# EAGLE board line follower (EAGLE 7.2.0)
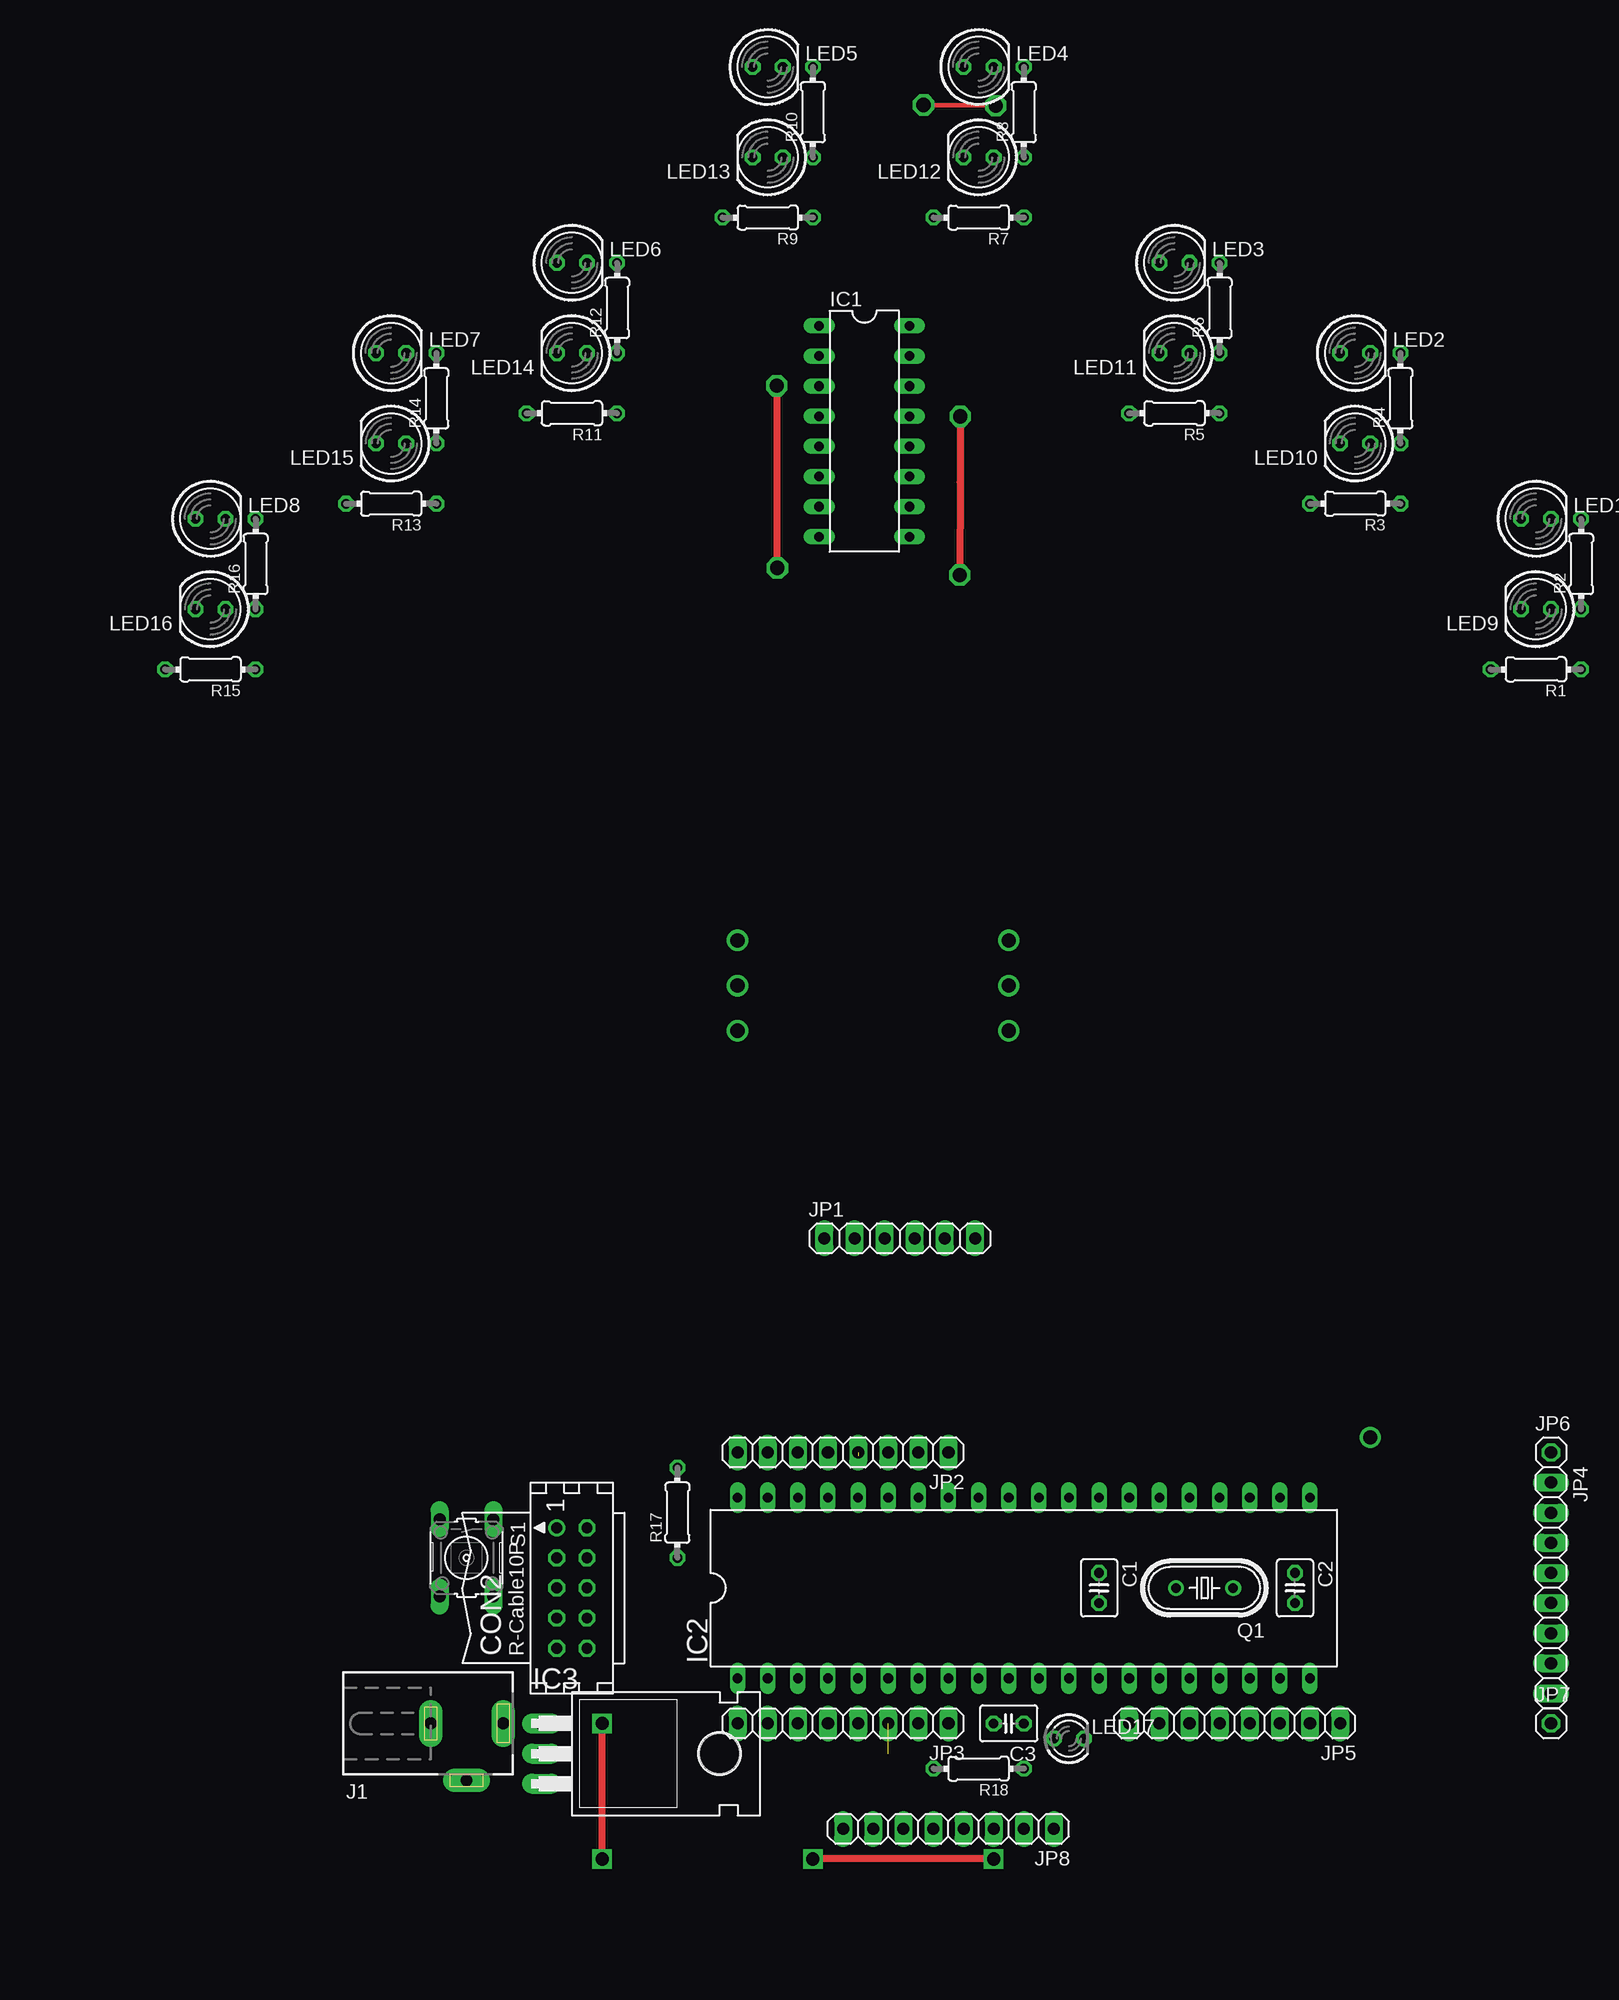
[diagram p0: board, top side]
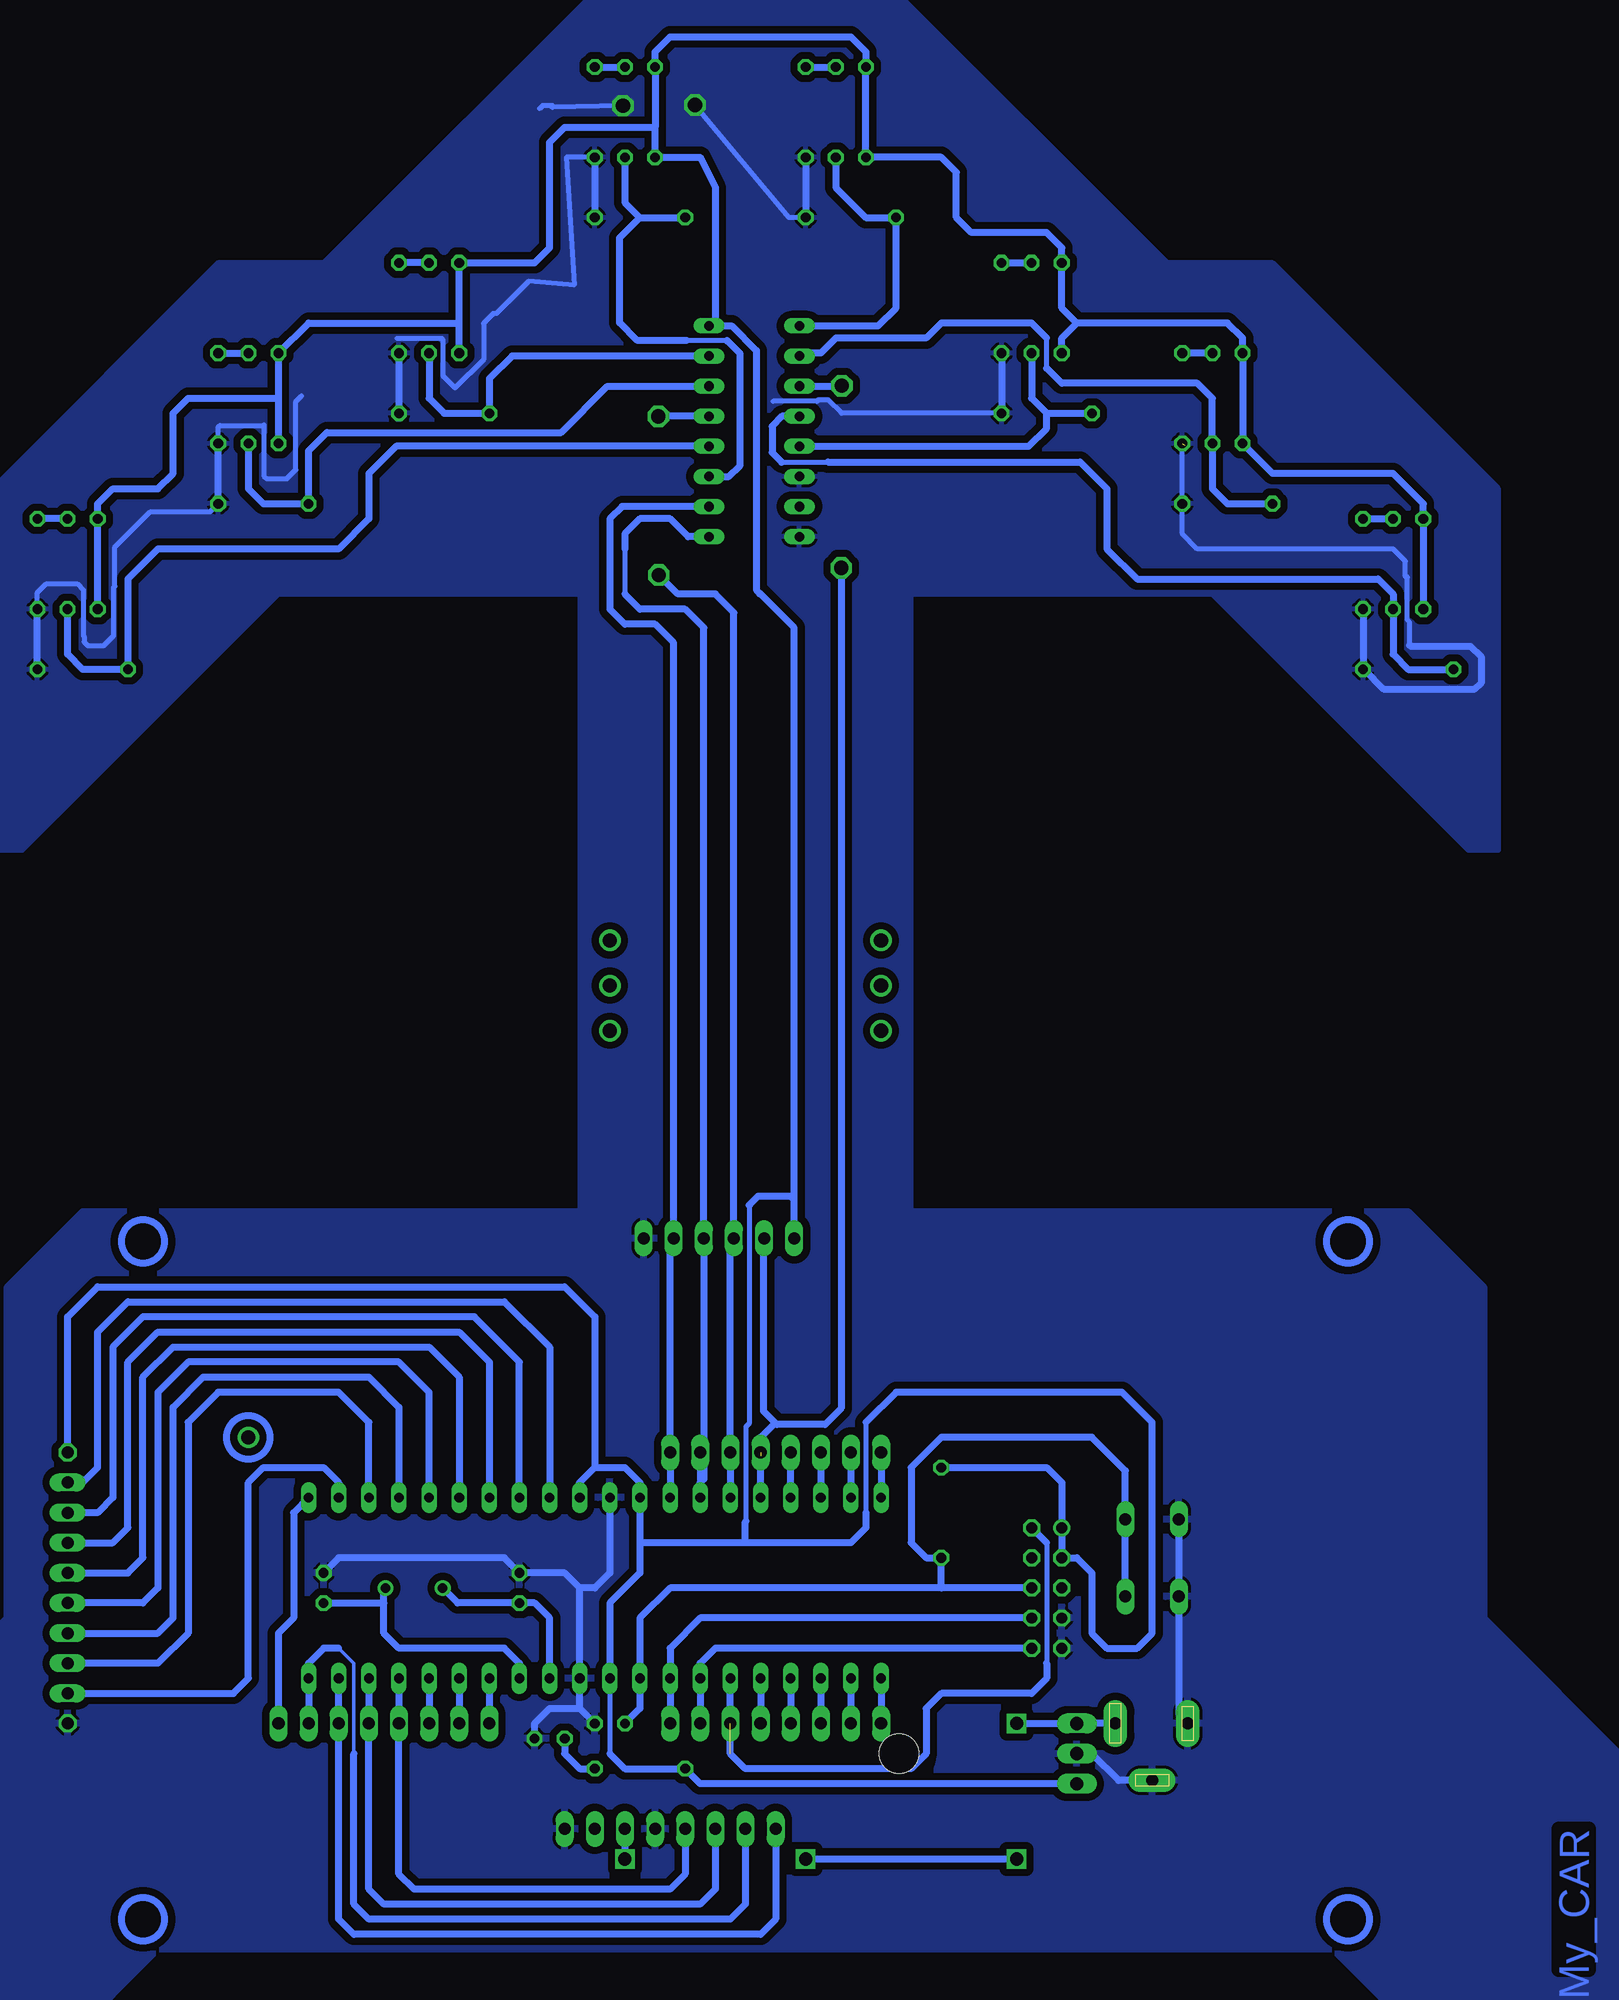
[diagram p1: board, bottom side, seen from below]

No outline drawn. Coordinates in mm, seen from the top.
Copper layers (1*16): Top 0.035mm / dielectric 1.5mm / Bottom 0.035mm
Design rules "default": minimum track width 10mil, minimum drill 24mil, track to track 8mil, track to pad 8mil, pad to pad 8mil, via to via 8mil, smd to smd 8mil, copper to edge 40mil, drill to drill 8mil, minimum pad ring 10mil, minimum via ring 8mil, stop-mask expansion 4mil, vias tented up to drill 0mil, thermal gap 10mil

## Footprints (pad centres in the part's own frame; a part is rotated, then mirrored left to right if it is on the bottom)
C025-030X050 = drill 0.813 octagon: 1 -1.27,0; 2 1.27,0
CON10L = drill 0.914: 1 5.08,1.27 | drill 0.914 octagon: 2 5.08,-1.27; 3 2.54,1.27; 4 2.54,-1.27; 5 0,1.27; 6 0,-1.27; 7 -2.54,1.27; 8 -2.54,-1.27; 9 -5.08,1.27; 10 -5.08,-1.27
DIL16 = drill 0.813 long: 1 -8.89,-3.81; 2 -6.35,-3.81; 3 -3.81,-3.81; 4 -1.27,-3.81; 5 1.27,-3.81; 6 3.81,-3.81; 7 6.35,-3.81; 8 8.89,-3.81; 9 8.89,3.81; 10 6.35,3.81; 11 3.81,3.81; 12 1.27,3.81; 13 -1.27,3.81; 14 -3.81,3.81; 15 -6.35,3.81; 16 -8.89,3.81
DIL40 = drill 0.813 long: 1 -24.13,-7.62; 2 -21.59,-7.62; 3 -19.05,-7.62; 4 -16.51,-7.62; 5 -13.97,-7.62; 6 -11.43,-7.62; 7 -8.89,-7.62; 8 -6.35,-7.62; 9 -3.81,-7.62; 10 -1.27,-7.62; 11 1.27,-7.62; 12 3.81,-7.62; 13 6.35,-7.62; 14 8.89,-7.62; 15 11.43,-7.62; 16 13.97,-7.62; 17 16.51,-7.62; 18 19.05,-7.62; 19 21.59,-7.62; 20 24.13,-7.62; 21 24.13,7.62; 22 21.59,7.62; 23 19.05,7.62; 24 16.51,7.62; 25 13.97,7.62; 26 11.43,7.62; 27 8.89,7.62; 28 6.35,7.62; 29 3.81,7.62; 30 1.27,7.62; 31 -1.27,7.62; 32 -3.81,7.62; 33 -6.35,7.62; 34 -8.89,7.62; 35 -11.43,7.62; 36 -13.97,7.62; 37 -16.51,7.62; 38 -19.05,7.62; 39 -21.59,7.62; 40 -24.13,7.62
TO220H = drill 1.118 long: 1 -2.54,-10.16; 2 0,-10.16; 3 2.54,-10.16 | hole 3.302: 0,4.826
DCJ0303 = drill 1 pad 2 long: 1 0,3.1; 2 4.8,0; 3 0,-3
1X06 = drill 1.016 long: 1 -6.35,0; 2 -3.81,0; 3 -1.27,0; 4 1.27,0; 5 3.81,0; 6 6.35,0
1X08 = drill 1.016 long: 1 -8.89,0; 2 -6.35,0; 3 -3.81,0; 4 -1.27,0; 5 1.27,0; 6 3.81,0; 7 6.35,0; 8 8.89,0
1X01 = drill 1.016 octagon: 1 0,0
LED5MM = drill 0.813 octagon: A -1.27,0; K 1.27,0
LED3MM = drill 0.813 octagon: A -1.27,0; K 1.27,0
HC49U-V = drill 0.813: 1 -2.413,0; 2 2.413,0
0204/7 = drill 0.813 octagon: 1 -3.81,0; 2 3.81,0
B3F-10XX = drill 1.016 long: 1 -3.251,2.261; 2 3.251,2.261; 3 -3.251,-2.261; 4 3.251,-2.261

## Placement (x,y rotation side)
C1  [C025-030X050]  -66.04,-50.8 270 top
C2  [C025-030X050]  -49.53,-50.8 270 top
C3  [C025-030X050]  -73.66,-62.23 180 top
CON2  [CON10L]  -110.49,-50.8 90 top
IC1  4052N  [DIL16]  -85.83,46.75 270 top
IC2  MEGA32-P  [DIL40]  -72.39,-50.8 0 top
IC3  7805T  [TO220H]  -102.87,-64.77 270 top
J1  [DCJ0303]  -119.38,-62.23 270 top
JP1  [1X06]  -82.85,-21.31 0 top
JP2  [1X08]  -87.63,-39.37 180 top
JP3  [1X08]  -87.63,-62.23 180 top
JP4  [1X08]  -27.94,-50.8 270 top
JP5  [1X08]  -54.61,-62.23 180 top
JP6  [1X01]  -27.94,-39.37 0 top
JP7  [1X01]  -27.94,-62.23 0 top
JP8  [1X08]  -78.74,-71.12 180 top
LED1  [LED5MM]  -29.21,39.37 0 top
LED2  [LED5MM]  -44.45,53.34 0 top
LED3  [LED5MM]  -59.69,60.96 0 top
LED4  [LED5MM]  -76.2,77.47 0 top
LED5  [LED5MM]  -93.98,77.47 0 top
LED6  [LED5MM]  -110.49,60.96 0 top
LED7  [LED5MM]  -125.73,53.34 0 top
LED8  [LED5MM]  -140.97,39.37 0 top
LED9  [LED5MM]  -29.21,31.75 180 top
LED10  [LED5MM]  -44.45,45.72 180 top
LED11  [LED5MM]  -59.69,53.34 180 top
LED12  [LED5MM]  -76.2,69.85 180 top
LED13  [LED5MM]  -93.98,69.85 180 top
LED14  [LED5MM]  -110.49,53.34 180 top
LED15  [LED5MM]  -125.73,45.72 180 top
LED16  [LED5MM]  -140.97,31.75 180 top
LED17  [LED3MM]  -68.58,-63.5 0 top
Q1  [HC49U-V]  -57.15,-50.8 180 top
R1  [0204/7]  -29.21,26.67 180 top
R2  [0204/7]  -25.4,35.56 90 top
R3  [0204/7]  -44.45,40.64 180 top
R4  [0204/7]  -40.64,49.53 90 top
R5  [0204/7]  -59.69,48.26 180 top
R6  [0204/7]  -55.88,57.15 90 top
R7  [0204/7]  -76.2,64.77 180 top
R8  [0204/7]  -72.39,73.66 90 top
R9  [0204/7]  -93.98,64.77 180 top
R10  [0204/7]  -90.17,73.66 90 top
R11  [0204/7]  -110.49,48.26 180 top
R12  [0204/7]  -106.68,57.15 90 top
R13  [0204/7]  -125.73,40.64 180 top
R14  [0204/7]  -121.92,49.53 90 top
R15  [0204/7]  -140.97,26.67 180 top
R16  [0204/7]  -137.16,35.56 90 top
R17  [0204/7]  -101.6,-44.45 90 top
R18  [0204/7]  -76.2,-66.04 180 top
S1  [B3F-10XX]  -119.38,-48.26 270 top

## Library data of the parts
C1-C3 R17 R18 = rcl
CON2 = con-harting; OC_FARNELL: unknown; OC_NEWARK: unknown
IC1 = 40xx
IC2 = atmel; MPN: ATMEGA32-16PU; OC_FARNELL: 1661729; OC_NEWARK: 51P1794
IC3 = linear
J1 = con-jack; OC_FARNELL: unknown; OC_NEWARK: unknown
JP1-JP8 = pinhead
LED1-LED17 = led
Q1 = crystal; OC_FARNELL: 1666969; OC_NEWARK: unknown
R1-R16 = resistor
S1 = switch-omron; MPN: B3F-1000; OC_FARNELL: 176432; OC_NEWARK: 36M3542

## Nets
+12V: IC3.1 J1.1 JP8.3
GND: C1.1 C2.1 C3.1 CON2.7 CON2.9 IC1.6 IC1.8 IC2.11 IC2.31 IC3.2 J1.2 J1.3 JP1.6 JP7.1 JP8.1 JP8.4 LED17.K R1.1 R2.1 R3.1 R4.1 R5.1 R6.1 R7.1 R8.1 R9.1 R10.1 R11.1 R12.1 R13.1 R14.1 R15.1 R16.1 S1.3 S1.4
N$1: LED1.K R2.2
N$2: IC1.12 LED9.A R1.2
N$3: IC1.9 IC2.34 JP1.4 JP2.2
N$4: IC2.37 JP2.5
N$5: LED2.K R4.2
N$6: IC1.14 LED10.A R3.2
N$7: LED3.K R6.2
N$8: IC1.15 LED11.A R5.2
N$9: LED4.K R8.2
N$10: IC1.11 LED12.A R7.2
N$11: LED5.K R10.2
N$12: IC1.3 IC2.36 JP1.2 JP2.4
N$13: LED6.K R12.2
N$14: IC1.13 IC2.35 JP1.3 JP2.3
N$15: LED7.K R14.2
N$17: LED8.K R16.2
N$18: IC2.19 JP5.3 JP8.8
N$24: C1.2 IC2.12 Q1.2
N$25: C2.2 IC2.13 Q1.1
N$26: CON2.8 IC2.8 JP3.1
N$27: C3.2 CON2.6 IC2.9 R17.1 S1.1 S1.2
N$28: LED17.A R18.1
N$29: CON2.2 IC2.6 JP3.3
N$30: CON2.10 IC2.7 JP3.2
N$31: IC1.10 IC2.33 JP1.5 JP2.1
N$32: IC2.38 JP2.6
N$33: IC2.39 JP2.7
N$34: IC2.40 JP2.8
N$38: IC2.5 JP3.4
N$39: IC2.4 JP3.5
N$40: IC2.3 JP3.6
N$41: IC2.2 JP3.7
N$42: IC2.1 JP3.8
N$43: IC2.29 JP4.1
N$44: IC1.4 LED16.A R15.2
N$45: IC1.2 LED15.A R13.2
N$46: IC1.5 LED14.A R11.2
N$47: IC1.1 LED13.A R9.2
N$48: IC2.28 JP4.2
N$49: IC2.27 JP4.3
N$50: IC2.26 JP4.4
N$51: IC2.25 JP4.5
N$52: IC2.24 JP4.6
N$53: IC2.23 JP4.7
N$54: IC2.22 JP4.8
N$55: IC2.21 JP5.1
N$56: IC2.20 JP5.2 JP8.7
N$58: IC2.18 JP5.4 JP8.6
N$59: IC2.17 JP5.5 JP8.5
N$60: IC2.16 JP5.6
N$61: IC2.15 JP5.7
N$62: IC2.14 JP5.8
VCC: CON2.1 CON2.3 IC1.16 IC2.10 IC2.30 IC2.32 IC3.3 JP1.1 JP6.1 LED1.A LED2.A LED3.A LED4.A LED5.A LED6.A LED7.A LED8.A LED9.K LED10.K LED11.K LED12.K LED13.K LED14.K LED15.K LED16.K R17.2 R18.2
VEE: IC1.7

## Tracks (layer width: path | path; a pad name or v marks a point on that pad's centre or on a via)
+12V  (via drill 1.1)
  Top 0.61: v-74.93,-73.66 v-90.17,-73.66 | v-107.95,-73.66 v-107.95,-62.23
  Bottom 0.61: J1.1 IC3.1 v-107.95,-62.23 | JP8.3 v-74.93,-73.66 | v-90.17,-73.66 v-107.95,-73.66
GND  (via drill 1.2 pad 0.61)  (1 unrouted)
  Top 0.406: v-80.84,74.27 -75.53,74.25 v-74.76,74.2
  Bottom 0.406: -141.09,28.7 -141.09,30.65 -140.91,30.84 -140.91,34.44 -140.86,34.49 -140.74,34.49 -140.74,35.79 -139.7,36.83 -123.19,36.83 -121.92,38.1 R13.1 R14.1 | -122.13,45.57 -121.71,45.99 | R9.1 -88.76,64.77 v-80.84,74.27 | v-74.76,74.2 -68.82,74.06 -68.68,74.2 | -68.68,74.2 -68.8,74.2 | -68.68,74.2 -67.99,74.2 -67.75,73.96 | R2.1 -25.4,33.15 -26.14,33.9 -28.74,33.9 -29.27,33.37 -29.27,29.51 -29.34,29.44 -29.34,28.98 -29.65,28.67 -30.98,28.67 -31.83,29.51 -31.83,33.58 -31.93,33.68 -31.93,36.98 -34.91,39.97 -39.97,39.97 R3.1 | R4.1 -40.64,47.1 -40.77,47.23 -44.42,47.23 -44.49,47.3 -44.49,42.98 -44.73,42.74 -46.42,42.74 -47.19,43.51 -47.19,49.26 -47.65,49.72 | R8.1 -69.98,69.85 -70.65,59.08 -66.84,59.4 -64.1,56.67 -63.82,56.67 -63.01,55.86 -63.01,52.81 -60.59,50.39 -60.59,50.42 -59.61,51.4 -59.61,54.46 -59.5,54.56 -55.75,54.56 -55.72,54.6 | R11.1 -93.19,48.26 -92.07,49.38 -91.23,49.38 -91.14,49.28 -87.43,49.28
  Bottom 0.61: R10.1 R9.1 | R12.1 R11.1 | R15.1 R16.1 -137.16,26.84 -136.95,26.63 -137.25,26.63 -138.87,25.02 -146.59,25.02 -147.15,25.57 -147.15,27.69 -146.24,28.6 -141.19,28.6 -141.09,28.7 | R8.1 R7.1 -72.28,64.77 -72.22,64.84 | R6.1 R5.1 | R3.1 R4.1 | R1.1 R2.1 | C3.1 -71.12,-60.96 | -71.12,-60.96 IC2.11 -71.12,-50.8 | LED17.K -67.31,-62.23 -68.58,-60.96 -71.12,-60.96 | -71.12,-50.8 -69.85,-49.53 C1.1 -64.77,-48.26 -50.8,-48.26 C2.1 | IC2.31 -73.66,-49.53 -72.39,-50.8 -71.12,-50.8 | S1.3 S1.4 -121.64,-61.49 J1.3 | J1.2 -116.56,-67.03 -114.3,-64.77 IC3.2
  pour Bottom (isolate 0.61): -24.13,11.43 -45.72,33.02 -71.12,33.02 -71.12,-40.64 -99.06,-40.64 -99.06,33.02 -124.46,33.02 -146.05,11.43 -148.59,11.43 -148.59,41.91 -129.54,60.96 -120.65,60.96 -96.52,85.09 -95.25,85.09 -90.17,90.17 -80.01,90.17 -74.93,85.09 -73.66,85.09 -49.53,60.96 -40.64,60.96 -21.59,41.91 -21.59,11.43
  pour Bottom (isolate 0.61): -147.32,-53.34 -160.02,-66.04 -160.02,-88.9 -142.24,-88.9 -134.62,-81.28 -35.56,-81.28 -27.94,-88.9 -10.16,-88.9 -10.16,-66.04 -22.86,-53.34 -22.86,-25.4 -29.21,-19.05 -140.97,-19.05 -147.32,-25.4
N$1
  Bottom 0.61: LED1.K R2.2
N$2
  Bottom 0.61: LED9.A -27.94,27.94 -29.21,26.67 R1.2 -33.02,34.29 -35.56,36.83 -50.8,36.83 -53.34,39.37 -53.34,43.18 -55.64,45.48 IC1.12
N$3
  Bottom 0.406: -74.93,36.83 -74.93,33.02
  Bottom 0.61: IC1.9 -80.25,37.86 -78.74,39.37 -76.2,39.37 -74.93,38.1 -74.93,36.83 | -74.93,33.02 -76.2,31.75 -80.01,31.75 -81.58,30.18 JP1.4 -81.58,-41.61 -81.28,-41.91 IC2.34 JP2.2
N$4
  Bottom 0.61: IC2.37 JP2.5
N$5
  Bottom 0.61: R4.2 LED2.K
N$6
  Bottom 0.61: LED10.A -43.18,41.91 -44.45,40.64 R3.2 -48.26,45.11 -49.62,46.47 | -49.62,46.47 | -49.62,46.47 -49.79,46.64 -69.54,46.64 -73.45,50.55 -82.01,50.55 IC1.14
N$7
  Bottom 0.61: LED3.K R6.2
N$8
  Bottom 0.61: LED11.A -58.42,49.53 -59.69,48.26 R5.2 -63.51,51.19 -65.41,53.1 IC1.15
N$9
  Bottom 0.61: R8.2 LED4.K
N$10
  Bottom 0.406: -83.53,54.4 -80.12,54.4
  Bottom 0.61: LED12.A -74.93,66.04 -76.2,64.77 | -76.2,64.77 R7.2 | IC1.11 -83.7,42.94 -84.63,43.86 -84.63,53.31 -83.67,54.27 -83.65,54.27 -83.53,54.4 | -80.12,54.4 -75.98,54.4 -74.49,55.89 -74.49,63.06 -76.2,64.77
N$11
  Bottom 0.61: R10.2 LED5.K
N$12  (via drill 1.2 pad 0.61)  (1 unrouted)
  Top 0.61: v-93.22,50.59 -93.22,35.27 v-93.17,35.22
  Bottom 0.61: IC1.3 -93.19,50.56 v-93.22,50.59 | v-93.17,35.22 -93.17,-35.65 -91.81,-37.01 -87.74,-37.01 -87.6,-36.86 | -87.6,-36.86 -86.63,-35.9 -86.63,-21.34 JP1.2 | IC2.36 -86.36,-39.66 | JP2.4 -86.36,-38.1 -87.6,-36.86
N$13
  Bottom 0.61: R12.2 LED6.K
N$14  (via drill 1.2 pad 0.61)
  Top 0.61: v-77.75,48 -77.75,42.42 v-77.78,34.62
  Bottom 0.61: IC1.13 -77.77,48.02 v-77.75,48 | -77.75,34.28 -77.78,34.32 v-77.78,34.62 -79.39,33.02 -82.55,33.02 -84.12,31.45 JP1.3 -83.84,-21.59 -83.82,-21.59 JP2.3 IC2.35
N$15
  Bottom 0.61: LED7.K R14.2
N$16  (via drill 1.2 pad 0.81)
  other vias: -96.52,3.81
N$17
  Bottom 0.61: R16.2 LED8.K
N$18
  Bottom 0.61: JP8.8 -87.63,-78.74 -86.36,-80.01 -52.07,-80.01 -50.8,-78.74 JP5.3 IC2.19
N$19  (via drill 1.2 pad 0.81)
  other vias: -73.66,3.81
N$20  (via drill 1.2 pad 0.81)
  other vias: -96.52,0
N$21  (via drill 1.2 pad 0.81)
  other vias: -73.66,0
N$22  (via drill 1.2 pad 0.81)
  other vias: -96.52,-3.81
N$23  (via drill 1.2 pad 0.81)
  other vias: -73.66,-3.81
N$24
  Bottom 0.61: IC2.12 -68.58,-53.34 -67.31,-52.07 C1.2 -60.83,-52.07 Q1.2
N$25
  Bottom 0.61: IC2.13 -66.04,-57.15 -64.77,-55.88 -55.88,-55.88 -54.61,-54.61 -54.61,-52.07 | -54.61,-52.07 -54.61,-50.93 Q1.1 | C2.2 -54.61,-52.07
N$26
  Bottom 0.61: CON2.8 -81.28,-53.34 -78.74,-55.88 IC2.8 JP3.1
N$27
  Bottom 0.61: -101.6,-50.8 -78.74,-50.8 -76.2,-53.34 IC2.9 -76.2,-60.96 C3.2 | CON2.6 -101.6,-50.8 | -101.6,-50.8 R17.1 -100.33,-48.26 -99.06,-46.99 -99.06,-40.64 -101.6,-38.1 -114.3,-38.1 -117.12,-40.92 S1.2 S1.1
N$28
  Bottom 0.61: LED17.A -69.85,-64.77 -71.12,-66.04 R18.1
N$29  (1 unrouted)
  Bottom 0.406: -110.49,-46.99 -110.49,-57.15
  Bottom 0.61: CON2.2 -110.49,-46.99 | IC2.6 -83.82,-64.77 -85.09,-66.04 -99.06,-66.04 -100.33,-64.77 -100.33,-60.96 -101.6,-59.69 -109.22,-59.69 -110.49,-58.42 -110.49,-57.15
N$30
  Bottom 0.61: CON2.10 -82.55,-55.88 -81.28,-57.15 IC2.7 JP3.2
N$31
  Bottom 0.61: IC1.10 -74.69,40.4 -73.66,39.37 -73.66,31.75 -74.93,30.48 -77.47,30.48 -79.04,28.91 JP1.5 -78.74,-21.61 JP2.1 IC2.33
N$32
  Bottom 0.61: JP2.6 IC2.38
N$33
  Bottom 0.61: JP2.7 IC2.39
N$34
  Bottom 0.61: JP2.8 IC2.40
N$36  (via drill 1.2 pad 0.81)
  other vias: -43.18,-38.1
N$38
  Bottom 0.61: IC2.5 JP3.4
N$39
  Bottom 0.61: IC2.4 JP3.5
N$40
  Bottom 0.61: IC2.3 JP3.6
N$41
  Bottom 0.61: IC2.2 JP3.7
N$42
  Bottom 0.61: IC2.1 JP3.8
N$43
  Bottom 0.61: JP4.1 -29.21,-41.91 -30.48,-40.64 -30.48,-29.21 -33.02,-26.67 -64.77,-26.67 -68.58,-30.48 IC2.29
N$44
  Bottom 0.406: -88.15,44.14 -92.01,44.14 -92.04,44.17
  Bottom 0.61: R15.2 -140.97,26.67 -139.7,27.94 LED16.A -139.7,33.02 -138.43,34.29 -118.11,34.29 -115.57,36.83 -115.57,41.91 -113.31,44.17 -92.04,44.17 | IC1.4 -88.17,48.02 -87.33,47.18 -87.33,44.95 -88.15,44.14
N$45
  Bottom 0.406: -110.49,52.07 -110.49,54.61
  Bottom 0.61: R13.2 -125.73,40.64 -124.46,41.91 LED15.A -124.46,49.53 -123.19,50.8 -111.76,50.8 -110.49,52.07 | -110.49,54.61 -109.22,55.88 -101.6,55.88 -100.33,54.61 -92.71,54.61 -91.44,53.34 -89.89,53.34 IC1.2
N$46
  Bottom 0.61: LED14.A -109.22,49.53 -110.49,48.26 | -110.49,48.26 R11.2 | IC1.5 -108.98,45.48 -110.49,46.99 -110.49,48.26
N$47
  Bottom 0.61: LED13.A -92.71,67.31 -95.25,64.77 R9.2 -97.79,57.15 -96.28,55.64 IC1.1
N$48
  Bottom 0.61: IC2.28 -66.04,-31.75 -62.23,-27.94 -34.29,-27.94 -31.75,-30.48 -31.75,-43.18 -30.48,-44.45 JP4.2
N$49
  Bottom 0.61: JP4.3 -31.75,-46.99 -33.02,-45.72 -33.02,-31.75 -35.56,-29.21 -60.96,-29.21 -63.5,-31.75 IC2.27
N$50
  Bottom 0.61: JP4.4 -33.02,-49.53 -34.29,-48.26 -34.29,-33.02 -36.83,-30.48 -58.42,-30.48 -60.96,-33.02 IC2.26
N$51
  Bottom 0.61: IC2.25 -58.42,-34.29 -55.88,-31.75 -38.1,-31.75 -35.56,-34.29 -35.56,-50.8 -34.29,-52.07 JP4.5
N$52
  Bottom 0.61: JP4.6 -35.56,-54.61 -36.83,-53.34 -36.83,-35.56 -39.37,-33.02 -53.34,-33.02 -55.88,-35.56 IC2.24
N$53
  Bottom 0.61: IC2.23 -53.34,-36.83 -50.8,-34.29 -40.64,-34.29 -38.1,-36.83 -38.1,-54.61 -35.56,-57.15 JP4.7
N$54
  Bottom 0.61: JP4.8 -41.91,-59.69 -43.18,-58.42 -43.18,-41.91 -44.45,-40.64 -49.53,-40.64 -50.8,-41.91 IC2.22
N$55
  Bottom 0.61: IC2.21 -46.99,-44.45 -46.99,-53.34 -45.72,-54.61 JP5.1
N$56
  Bottom 0.305: -52.07,-64.77 -52.07,-57.15 -50.8,-55.88
  Bottom 0.61: JP5.2 IC2.20 -48.26,-57.15 -49.53,-55.88 -50.8,-55.88 | JP8.7 -85.09,-77.47 -83.82,-78.74 -53.34,-78.74 -52.07,-77.47 -52.07,-64.77
N$58
  Bottom 0.61: IC2.18 JP5.4 -53.34,-76.2 -54.61,-77.47 -81.28,-77.47 -82.55,-76.2 JP8.6
N$59
  Bottom 0.61: IC2.17 JP5.5 -55.88,-74.93 -57.15,-76.2 -78.74,-76.2 -80.01,-74.93 JP8.5
N$60
  Bottom 0.61: IC2.16 JP5.6
N$61
  Bottom 0.61: IC2.15 JP5.7
N$62
  Bottom 0.61: IC2.14 JP5.8
VCC
  Bottom 0.406: IC2.10 -73.66,-64.77 | -85.4,-18.54 -85.4,-36.93 -85.12,-37.21 -85.12,-45.17 | -95.25,-36.83 -95.25,-44.45
  Bottom 0.61: LED16.K LED8.A -142.24,40.64 -139.7,43.18 -129.54,43.18 LED15.K LED7.A -127,54.61 -125.73,55.88 -113.03,55.88 | LED9.K LED1.A -30.48,40.64 -31.75,41.91 -35.56,41.91 -36.83,43.18 -36.83,48.26 -38.1,49.53 -45.72,49.53 | -77.47,72.39 LED4.A -77.47,78.74 -78.74,80.01 -93.98,80.01 -95.25,78.74 LED5.A LED13.K -101.6,69.85 -102.87,68.58 -102.87,64.77 -104.14,63.5 -110.49,63.5 -111.76,62.23 LED6.A -111.76,57.15 -113.03,55.88 | -45.72,49.53 LED2.A -48.26,55.88 -60.96,55.88 | -45.72,49.53 LED10.K | LED14.K -111.76,54.61 -113.03,55.88 | -77.47,72.39 LED12.K -81.28,69.85 -82.55,67.31 -82.55,56.16 IC1.16 -83.93,55.64 -86.02,53.55 -86.02,33.36 -86.36,33.02 | -77.47,72.39 -69.85,72.39 -68.58,71.12 -68.58,62.23 -67.31,60.96 LED3.A -60.96,55.88 | LED11.K -60.96,55.88 | -86.36,33.02 -89.2,30.18 JP1.1 -89.2,-18.08 -88.9,-17.78 -86.15,-17.78 -85.47,-18.46 -85.47,-18.47 -85.4,-18.54 | -86.36,33.02 -86.28,33.02 | -73.66,-64.77 -74.93,-66.04 R18.2 -81.28,-67.31 IC3.3 | IC2.30 -71.12,-41.91 -72.39,-40.64 | -72.39,-40.64 -74.93,-40.64 -76.2,-41.91 IC2.32 -76.2,-46.99 | -76.2,-46.99 -76.2,-49.53 -73.66,-52.07 IC2.10 | R17.2 -110.49,-40.64 -111.76,-41.91 CON2.1 CON2.3 -113.03,-48.26 -114.3,-49.53 -114.3,-54.61 -115.57,-55.88 -118.11,-55.88 -119.38,-54.61 -119.38,-36.83 -116.84,-34.29 -97.79,-34.29 -95.25,-36.83 | -85.09,-46.99 -76.2,-46.99 | -95.25,-44.45 -95.25,-45.72 -93.98,-46.99 -85.09,-46.99 | -85.09,-46.99 -85.09,-45.21 -85.12,-45.17 | JP6.1 -27.94,-27.94 -30.48,-25.4 -69.85,-25.4 -72.39,-27.94 -72.39,-40.64
(copper drawn outside any net)
  shapes: Bottom circle x5

## Text on the board
Bottom: My_CAR